# EAGLE board hall maintenance system (EAGLE 7.6.0)

Size 73.58 x 139.59 mm. Coordinates in mm from the lower left corner, seen from the top.
Outline: 0,0 56.82,0 56.82,53.33 0,53.33 0,0
Copper layers (1*16): Top 0.035mm / dielectric 1.5mm / Bottom 0.035mm
Design rules "default": minimum track width 10mil, minimum drill 24mil, track to track 8mil, track to pad 8mil, pad to pad 8mil, via to via 8mil, smd to smd 8mil, copper to edge 40mil, drill to drill 8mil, minimum pad ring 10mil, minimum via ring 8mil, stop-mask expansion 4mil, vias tented up to drill 0mil, thermal gap 10mil

## Footprints (pad centres in the part's own frame; a part is rotated, then mirrored left to right if it is on the bottom)
DC-POWER = drill 0.889 pad 2.54 octagon: + 0,2.54; - 0,-2.54
LED5MM = drill 0.813 octagon: A -1.27,0; K 1.27,0
SNR6-D19.0MM = drill 1.3 pad 2: 1 -3.355,3.355; 2 -3.355,-3.355; 3 3.355,3.355; 4 3.355,-3.355; 5 0,4.75; 6 0,-4.75
2P-2.54-65/35MIL = drill 0.889 pad 1.651 square: 1 0,1.27 | drill 0.889 pad 1.651: 2 0,-1.27
PIEZO-22MM = drill 1 pad 2.54: P$1 -5,0; P$2 5,0
1X3P-2.54-2.54-11.6-3.0-BLACK-MALE = drill 0.889 pad 1.651 square: 1 0,2.54 | drill 0.889 pad 1.651: 2 0,0; 3 0,-2.54
0207/10 = drill 0.813 octagon: 1 -5.08,0; 2 5.08,0
B25V = drill 0.813 long: A 2.54,0.635; E -2.54,0.635; S 0,0.635
TO220 = drill 1.118 long: 1 -2.54,-6.35; 2 0,-6.35; 3 2.54,-6.35 | hole 3.302: 0,11.176
ARDUINO_UNO = drill 1.016 pad 1.88: 0 63.5,50.8; 1 60.96,50.8; 2 58.42,50.8; 3 55.88,50.8; 3.3V 35.56,2.54; 4 53.34,50.8; 5 50.8,50.8; 5V 38.1,2.54; 6 48.26,50.8; 7 45.72,50.8; 8 41.656,50.8; 9 39.116,50.8; 10 36.576,50.8; 11 34.036,50.8; 12 31.496,50.8; 13 28.956,50.8; A0 50.8,2.54; A1 53.34,2.54; A2 55.88,2.54; A3 58.42,2.54; A4 60.96,2.54; A5 63.5,2.54; AREF 23.876,50.8; GND 26.416,50.8; GND. 43.18,2.54; GND.. 40.64,2.54; I/OREF 30.48,2.54; N/C 27.94,2.54; RESET 33.02,2.54; SCL 18.796,50.8; SDA 21.336,50.8; VIN 45.72,2.54 | hole 3.2: 66.04,7.62; 66.04,35.56; 15.24,50.8; 13.97,2.54
TO92 = drill 0.813 octagon: 1 1.27,0; 2 0,1.905; 3 -1.27,0
1X16P-2.54-2.54-11.6-3.0-BLACK-MALE = drill 0.889 pad 1.651 square: 1 0,19.05 | drill 0.889 pad 1.651: 2 0,16.51; 3 0,13.97; 4 0,11.43; 5 0,8.89; 6 0,6.35; 7 0,3.81; 8 0,1.27; 9 0,-1.27; 10 0,-3.81; 11 0,-6.35; 12 0,-8.89; 13 0,-11.43; 14 0,-13.97; 15 0,-16.51; 16 0,-19.05

## Placement (x,y rotation side)
BAT1  [DC-POWER]  5,251.38 0 top  (outside the outline)
D1  [LED5MM]  5,48.18 0 top
D2  [LED5MM]  5,200.58 0 top  (outside the outline)
D3  [LED5MM]  5,213.28 0 top  (outside the outline)
GAS1  [SNR6-D19.0MM]  5,365.68 0 top  (outside the outline)
M1  [2P-2.54-65/35MIL]  5,276.78 0 top  (outside the outline)
M2  [2P-2.54-65/35MIL]  5,302.18 0 top  (outside the outline)
Mexhauster  [2P-2.54-65/35MIL]  5,327.58 0 top  (outside the outline)
PIEZO1  [PIEZO-22MM]  5,22.78 0 top
PIRin  [1X3P-2.54-2.54-11.6-3.0-BLACK-MALE]  5,175.18 0 top  (outside the outline)
PIRout  [1X3P-2.54-2.54-11.6-3.0-BLACK-MALE]  5,187.88 0 top  (outside the outline)
R1  1k‎Ω  [0207/10]  5,35.48 0 top
R2  1k‎Ω  [0207/10]  5,225.98 0 top  (outside the outline)
R3  220‎Ω  [0207/10]  5,149.78 0 top  (outside the outline)
R4  1k‎Ω  [0207/10]  5,238.68 0 top  (outside the outline)
R5  1k‎Ω  [0207/10]  5,264.08 0 top  (outside the outline)
R6  3k‎Ω  [0207/10]  5,352.98 0 top  (outside the outline)
Rpot2  250k‎Ω  [B25V]  5,137.08 0 top
T1  [TO220]  5,289.48 0 top  (outside the outline)
T2  [TO220]  5,314.88 0 top  (outside the outline)
T3  [TO220]  5,340.28 0 top  (outside the outline)
U1  [ARDUINO_UNO]  5,73.58 0 top
U2  [ARDUINO_UNO]  5,60.88 0 top
U4  [TO92]  5,162.48 0 top  (outside the outline)
U5  [ARDUINO_UNO]  5,86.28 0 top
U6  [TO92]  5,98.98 0 top
U7  [TO92]  5,111.68 0 top
U11  [1X16P-2.54-2.54-11.6-3.0-BLACK-MALE]  5,124.38 0 top
Umaster  [ARDUINO_UNO]  5,10.08 0 top

## Library data of the parts
BAT1 D1-D3 GAS1 M1 M2 Mexhauster PIEZO1 PIRin PIRout R1-R6 Rpot2 T1-T3 U1 U2 U4-U7 U11 Umaster = AUTODESK_CIRCUITS_BREADBOARD

## Nets
N$1: D1.K PIEZO1.P$2 Umaster.GND
N$2: R1.1 Umaster.13
N$3: D1.A R1.2
N$4: PIEZO1.P$1 Umaster.12
N$5: U1.A4 U2.A4 U5.A4 Umaster.A4
N$6: U1.A5 U2.A5 U5.A5 Umaster.A5
N$7: U1.5V U6.3
N$8: U1.GND. U6.1
N$9: U1.A0 U6.2
N$10: U5.5V U7.3
N$11: U5.A0 U7.2
N$12: U5.GND.. U7.1
N$13: Rpot2.E U11.1 U11.5 U11.16 Umaster.GND..
N$14: U11.6 Umaster.10
N$15: U11.11 Umaster.5
N$16: U11.12 Umaster.4
N$17: U11.13 Umaster.3
N$18: U11.14 Umaster.2
N$19: Rpot2.S U11.3
N$20: R3.2 U11.15
N$21: R3.1 Rpot2.A U11.2 Umaster.5V
N$22: U11.4 Umaster.11
N$23: GAS1.2 GAS1.4 GAS1.6 PIRin.2 PIRout.2 U2.5V U4.3
N$24: U2.A0 U4.2
N$25: PIRout.1 U2.GND.. U4.1
N$26: PIRin.3 U2.6
N$27: PIRout.3 U2.7
N$28: D2.A R2.2
N$29: D3.A R4.2
N$30: D2.K D3.K GAS1.5 U2.GND
N$31: BAT1.+ M1.2 M2.2 Mexhauster.2
N$32: R5.1 T1.1 U2.3
N$33: R2.1 U2.5
N$34: R4.1 U2.4
N$35: M1.1 T1.2
N$36: T2.1 U2.2
N$37: M2.1 T2.2
N$38: T3.1 U2.8
N$39: BAT1.- PIRin.1 R5.2 R6.1 T1.3 T2.3 T3.3 U1.GND.. U2.GND. U5.GND. Umaster.GND.
N$40: Mexhauster.1 T3.2
N$41: GAS1.1 R6.2
N$42: GAS1.3 U2.A1

## Tracks (layer width: path | path; a pad name or v marks a point on that pad's centre or on a via)
N$1  (2 unrouted)
N$2  (1 unrouted)
N$3  (1 unrouted)
N$4  (1 unrouted)
N$5  (3 unrouted)
N$6  (3 unrouted)
N$7  (1 unrouted)
N$8  (1 unrouted)
N$9  (1 unrouted)
N$10  (1 unrouted)
N$11  (1 unrouted)
N$12  (1 unrouted)
N$13  (4 unrouted)
N$14  (1 unrouted)
N$15  (1 unrouted)
N$16  (1 unrouted)
N$17  (1 unrouted)
N$18  (1 unrouted)
N$19  (1 unrouted)
N$20  (1 unrouted)
N$21  (3 unrouted)
N$22  (1 unrouted)
N$23  (6 unrouted)
N$24  (1 unrouted)
N$25  (2 unrouted)
N$26  (1 unrouted)
N$27  (1 unrouted)
N$28  (1 unrouted)
N$29  (1 unrouted)
N$30  (3 unrouted)
N$31  (3 unrouted)
N$32  (2 unrouted)
N$33  (1 unrouted)
N$34  (1 unrouted)
N$35  (1 unrouted)
N$36  (1 unrouted)
N$37  (1 unrouted)
N$38  (1 unrouted)
N$39  (10 unrouted)
N$40  (1 unrouted)
N$41  (1 unrouted)
N$42  (1 unrouted)